# EAGLE board VUEQ (2) v64 (EAGLE 9.7.0)
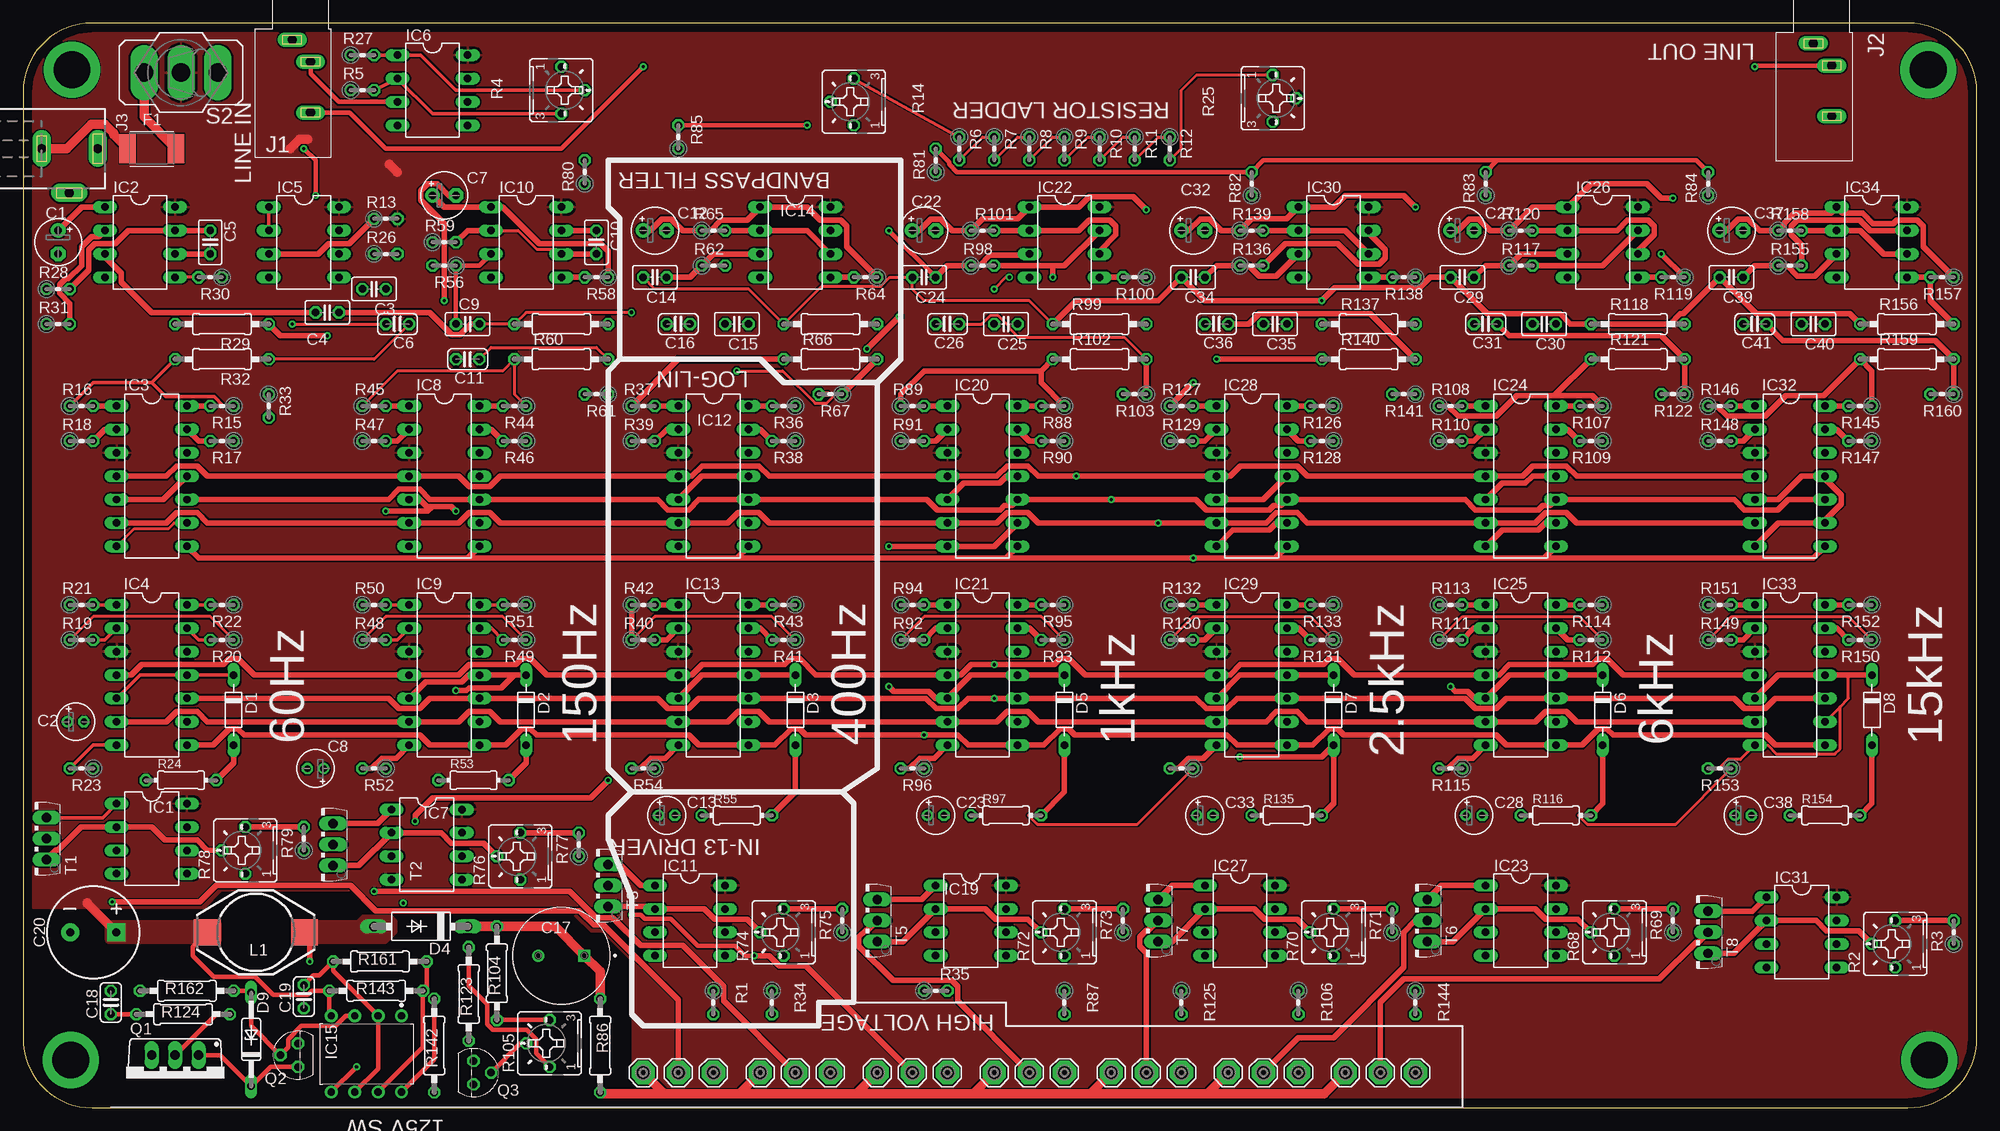
[diagram p0: board, top side]
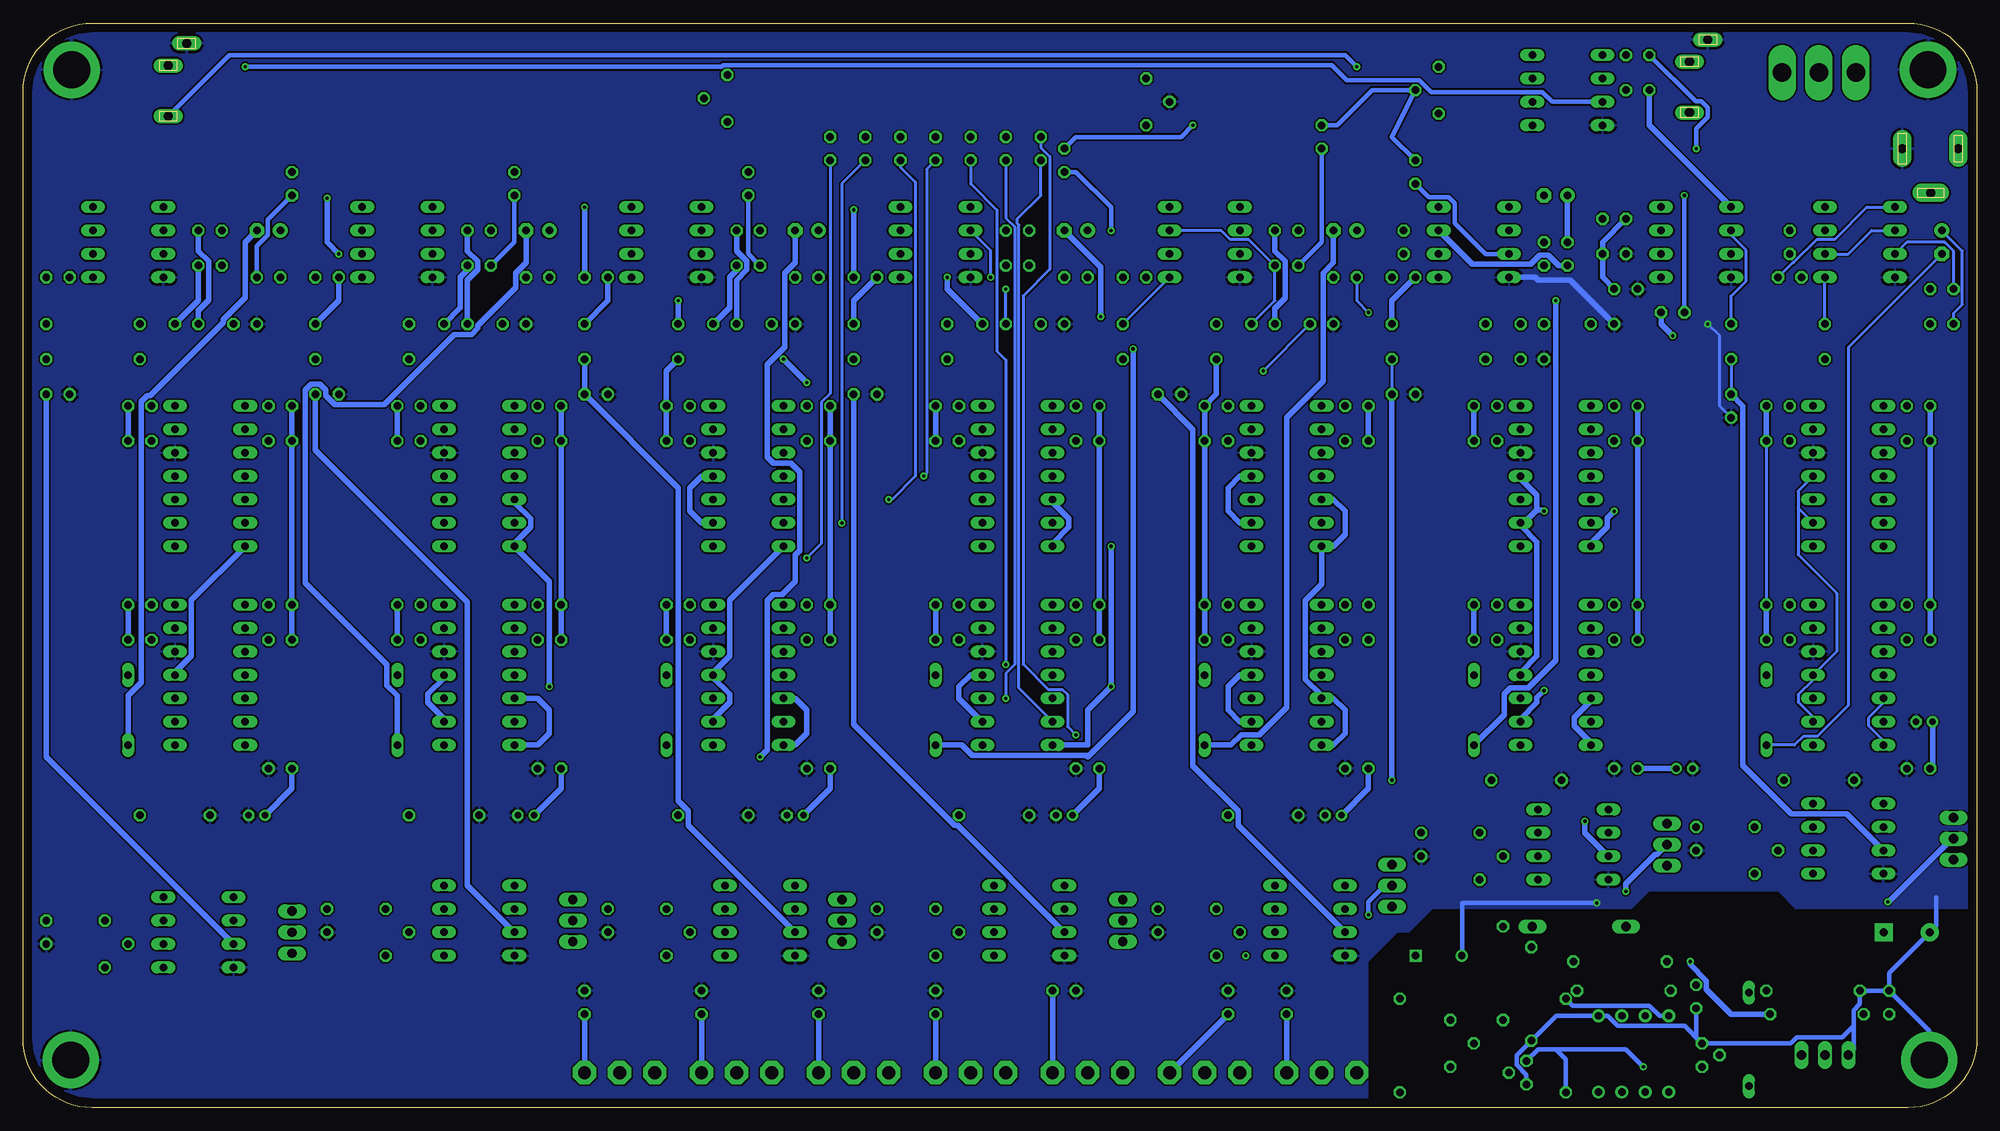
[diagram p1: board, bottom side, seen from below]

Size 212.07 x 117.78 mm. Coordinates in mm from the lower left corner, seen from the top.
Outline: 0,110.28 0,7.5 arc90 7.5,0 204.57,0 arc90 212.07,7.5 212.07,110.28 arc90 204.57,117.78 7.5,117.78 arc90 0,110.28
Copper layers (1*16): Top 0.035mm / dielectric 1.5mm / Bottom 0.035mm
Design rules "default": minimum track width 6mil, minimum drill 0.35mm, track to track 6mil, track to pad 6mil, pad to pad 6mil, via to via 6mil, smd to smd 6mil, copper to edge 40mil, drill to drill 6mil, minimum pad ring 10mil, minimum via ring 8mil, stop-mask expansion 4mil, vias tented up to drill 0mil, thermal gap 10mil

## Footprints (pad centres in the part's own frame; a part is rotated, then mirrored left to right if it is on the bottom)
E2,5-5 = drill 0.813 pad 1.6: + -1.27,0 | drill 0.813 pad 1.6 octagon: - 1.27,0
E1,8-4 = drill 0.711 pad 1.168: + -0.889,0 | drill 0.711 pad 1.168 octagon: - 0.889,0
C025-025X050 = drill 0.813 octagon: 1 -1.27,0; 2 1.27,0
C025-024X044 = drill 0.813 octagon: 1 -1.27,0; 2 1.27,0
CAP_RADIAL_5MM = drill 0.8 pad 1.2 square: 1 -2.5,0 | drill 0.8 pad 1.2: 2 2.5,0
CPOL-RADIAL-5MM-10MM-KIT = drill 0.9 pad 1.93 square: + 2.5,0 | drill 0.9 pad 1.93: - -2.5,0
D-7.5 = drill 0.813 long: A 3.81,0; C -3.81,0
F126-10 = drill 1.016 long: A 5.08,0; C -5.08,0
DO35Z10 = drill 0.813 long: A 5.08,0; C -5.08,0
FUSC4532X125 = smd 1.78 x 3.15: 1 -2.615,0; 2 2.615,0
DIL08 = drill 0.813 long: 1 -3.81,-3.81; 2 -1.27,-3.81; 3 1.27,-3.81; 4 3.81,-3.81; 5 3.81,3.81; 6 1.27,3.81; 7 -1.27,3.81; 8 -3.81,3.81
DIL14 = drill 0.813 long: 1 -7.62,-3.81; 2 -5.08,-3.81; 3 -2.54,-3.81; 4 0,-3.81; 5 2.54,-3.81; 6 5.08,-3.81; 7 7.62,-3.81; 8 7.62,3.81; 9 5.08,3.81; 10 2.54,3.81; 11 0,3.81; 12 -2.54,3.81; 13 -5.08,3.81; 14 -7.62,3.81
DIP826W53P254L959H508Q8B = drill 0.786 pad 1.386: 1 -4.13,3.81; 2 -4.13,1.27; 3 -4.13,-1.27; 4 -4.13,-3.81; 5 4.13,-3.81; 6 4.13,-1.27; 7 4.13,1.27; 8 4.13,3.81
SE14 = drill 1.397 pad 2.54 octagon: MP 0,0
CUI_SJ1-3533N = drill 1 pad 1.6 long: 1 0,0; 2 2.4,2; 3 7.9,2
DCJ0202 = drill 1 pad 2 long: 1 0,3.1; 2 4.8,0; 3 0,-3
DO3316P = smd 2.92 x 2.79: 1 -5.28,0; 2 5.28,0
TO220BV = drill 1.016 long: D 0,-2.54; G -2.54,-2.54; S 2.54,-2.54
TO92 = drill 0.813 octagon: 1 1.27,0; 2 0,1.905; 3 -1.27,0
0204V = drill 0.813 octagon: 1 -1.27,0; 2 1.27,0
B25P = drill 0.813 octagon: A -2.54,0; E 2.54,0; S 0,2.54
0204/7 = drill 0.813 octagon: 1 -3.81,0; 2 3.81,0
0207/10 = drill 0.813 octagon: 1 -5.08,0; 2 5.08,0
320-916 = drill 2.007 long: 1 0,4.013; 2 0,0; 3 0,-4.013
TO126V = drill 1.016 long: 1 -2.286,-1.27; 2 0,-1.27; 3 2.286,-1.27
SCREW_HOLE = drill 4 pad 6.096: P$1 0,0

## Placement (x,y rotation side)
C1  100uF  [E2,5-5]  3.81,93.98 270 top
C2  4.7uF  [E1,8-4]  5.71,41.91 0 top
C3  .1uF  [C025-025X050]  38.1,88.9 180 top
C4  F-C1  [C025-025X050]  33.02,86.36 0 top
C5  F-C2  [C025-025X050]  20.32,93.98 270 top
C6  1uF  [C025-024X044]  40.64,85.09 180 top
C7  100uF  [E2,5-5]  45.72,99.06 0 top
C8  4.7uF  [E1,8-4]  31.75,36.83 180 top
C9  F-C1  [C025-025X050]  48.26,85.09 0 top
C10  F-C2  [C025-025X050]  62.23,93.98 270 top
C11  1uF  [C025-024X044]  48.26,81.28 180 top
C12  100uF  [E2,5-5]  68.58,95.25 0 top
C13  4.7uF  [E1,8-4]  69.85,31.75 0 top
C14  F-C1  [C025-025X050]  68.58,90.17 180 top
C15  F-C2  [C025-025X050]  77.47,85.09 180 top
C16  1uF  [C025-024X044]  71.12,85.09 180 top
C17  4.7uF 350V  [CAP_RADIAL_5MM]  58.42,16.51 180 top
C18  470pF  [C025-024X044]  9.53,11.43 90 top
C19  2n2  [C025-024X044]  30.48,12.06 270 top
C20  1mf  [CPOL-RADIAL-5MM-10MM-KIT]  7.62,19.05 0 top
C22  100uF  [E2,5-5]  97.79,95.25 0 top
C23  4.7uF  [E1,8-4]  99.06,31.75 0 top
C24  F-C1  [C025-025X050]  97.79,90.17 180 top
C25  F-C2  [C025-025X050]  106.68,85.09 180 top
C26  1uF  [C025-024X044]  100.33,85.09 180 top
C27  100uF  [E2,5-5]  156.21,95.25 0 top
C28  4.7uF  [E1,8-4]  157.48,31.75 0 top
C29  F-C1  [C025-025X050]  156.21,90.17 180 top
C30  F-C2  [C025-025X050]  165.1,85.09 180 top
C31  1uF  [C025-024X044]  158.75,85.09 180 top
C32  100uF  [E2,5-5]  127,95.25 0 top
C33  4.7uF  [E1,8-4]  128.27,31.75 0 top
C34  F-C1  [C025-025X050]  127,90.17 180 top
C35  F-C2  [C025-025X050]  135.89,85.09 180 top
C36  1uF  [C025-024X044]  129.54,85.09 180 top
C37  100uF  [E2,5-5]  185.42,95.25 0 top
C38  4.7uF  [E1,8-4]  186.69,31.75 0 top
C39  F-C1  [C025-025X050]  185.42,90.17 180 top
C40  F-C2  [C025-025X050]  194.31,85.09 180 top
C41  1uF  [C025-024X044]  187.96,85.09 180 top
D1  1N4148  [D-7.5]  22.86,43.18 270 top
D2  1N4148  [D-7.5]  54.61,43.18 270 top
D3  1N4148  [D-7.5]  83.82,43.18 270 top
D4  BYT01  [F126-10]  43.18,19.69 180 top
D5  1N4148  [D-7.5]  113.03,43.18 270 top
D6  1N4148  [D-7.5]  171.45,43.18 270 top
D7  1N4148  [D-7.5]  142.24,43.18 270 top
D8  1N4148  [D-7.5]  200.66,43.18 270 top
D9  1N914  [DO35Z10]  24.77,7.42 90 top
F1  1812L010  [FUSC4532X125]  13.97,104.14 0 top
IC1  LM358N  [DIL08]  13.97,29.21 270 top
IC2  LM358N  [DIL08]  12.7,93.98 270 top
IC3  TS3704  [DIL14]  13.97,68.58 270 top
IC4  TS3704  [DIL14]  13.97,46.99 270 top
IC5  TL3472  [DIL08]  30.48,93.98 270 top
IC6  LM358N  [DIL08]  44.45,110.49 270 top
IC7  LM358N  [DIL08]  43.82,28.57 270 top
IC8  TS3704  [DIL14]  45.72,68.58 270 top
IC9  TS3704  [DIL14]  45.72,46.99 270 top
IC10  LM358N  [DIL08]  54.61,93.98 270 top
IC11  LM358N  [DIL08]  72.39,20.32 270 top
IC12  TS3704  [DIL14]  74.93,68.58 270 top
IC13  TS3704  [DIL14]  74.93,46.99 270 top
IC14  LM358N  [DIL08]  83.82,93.98 270 top
IC15  ICM7555_DIP  [DIP826W53P254L959H508Q8B]  37.27,5.84 270 top
IC19  LM358N  [DIL08]  102.87,20.32 270 top
IC20  TS3704  [DIL14]  104.14,68.58 270 top
IC21  TS3704  [DIL14]  104.14,46.99 270 top
IC22  LM358N  [DIL08]  113.03,93.98 270 top
IC23  LM358N  [DIL08]  162.56,20.32 270 top
IC24  TS3704  [DIL14]  162.56,68.58 270 top
IC25  TS3704  [DIL14]  162.56,46.99 270 top
IC26  LM358N  [DIL08]  171.45,93.98 270 top
IC27  LM358N  [DIL08]  132.08,20.32 270 top
IC28  TS3704  [DIL14]  133.35,68.58 270 top
IC29  TS3704  [DIL14]  133.35,46.99 270 top
IC30  LM358N  [DIL08]  142.24,93.98 270 top
IC31  LM358N  [DIL08]  193.04,19.05 270 top
IC32  TS3704  [DIL14]  191.77,68.58 270 top
IC33  TS3704  [DIL14]  191.77,46.99 270 top
IC34  LM358N  [DIL08]  200.66,93.98 270 top
IN13-1  SE14  [SE14]  67.31,3.81 0 top
IN13-2  SE14  [SE14]  71.12,3.81 0 top
IN13-3  SE14  [SE14]  80.01,3.81 0 top
IN13-4  SE14  [SE14]  83.82,3.81 0 top
IN13-5  SE14  [SE14]  92.71,3.81 0 top
IN13-6  SE14  [SE14]  96.52,3.81 0 top
IN13-9  SE14  [SE14]  105.41,3.81 0 top
IN13-10  SE14  [SE14]  109.22,3.81 0 top
IN13-11  SE14  [SE14]  130.81,3.81 0 top
IN13-12  SE14  [SE14]  134.62,3.81 0 top
IN13-13  SE14  [SE14]  118.11,3.81 0 top
IN13-14  SE14  [SE14]  121.92,3.81 0 top
IN13-15  SE14  [SE14]  143.51,3.81 0 top
IN13-16  SE14  [SE14]  147.32,3.81 0 top
IN-13-1  SE14  [SE14]  87.63,3.81 0 top
IN-13-2  SE14  [SE14]  100.33,3.81 0 top
IN-13-3  SE14  [SE14]  74.93,3.81 0 top
IN-13-5  SE14  [SE14]  113.03,3.81 0 top
IN-13-6  SE14  [SE14]  138.43,3.81 0 top
IN-13-7  SE14  [SE14]  125.73,3.81 0 top
IN-13-8  SE14  [SE14]  151.13,3.81 0 top
J1  SJ1-3533N  [CUI_SJ1-3533N]  29.21,115.96 270 top
J2  SJ1-3533N  [CUI_SJ1-3533N]  194.31,115.57 270 top
J3  DCJ0202  [DCJ0202]  5.02,104.14 270 top
L1  [DO3316P]  25.26,19.05 180 top
Q1  IRF740  [TO220BV]  16.51,3.17 180 top
Q2  PNP  [TO92]  29.84,5.71 90 top
Q3  BC547  [TO92]  48.9,3.81 270 top
R1  220k  [0204V]  74.93,11.43 270 top
R2  2k  [B25P]  203.2,17.78 90 top
R3  470  [0204V]  209.55,19.05 90 top
R4  250k  [B25P]  58.42,110.49 270 top
R5  10k  [0204V]  36.83,110.49 0 top
R6  470  [0204V]  101.6,104.14 270 top
R7  750  [0204V]  105.41,104.14 270 top
R8  1.1K  [0204V]  109.22,104.14 270 top
R9  2K  [0204V]  113.03,104.14 270 top
R10  2.7K  [0204V]  116.84,104.14 270 top
R11  4.7K  [0204V]  120.65,104.14 270 top
R12  7.5K  [0204V]  124.46,104.14 270 top
R13  100k  [0204V]  39.37,96.52 0 top
R14  2K  [B25P]  90.17,109.22 90 top
R15  10k  [0204V]  21.59,76.2 180 top
R16  10k  [0204V]  6.35,76.2 0 top
R17  10k  [0204V]  21.59,72.39 180 top
R18  10k  [0204V]  6.35,72.39 0 top
R19  10k  [0204V]  6.35,50.8 0 top
R20  10k  [0204V]  21.59,50.8 180 top
R21  10k  [0204V]  6.35,54.61 0 top
R22  10k  [0204V]  21.59,54.61 180 top
R23  10k  [0204V]  6.35,36.83 180 top
R24  1K  [0204/7]  17.14,35.56 0 top
R25  25K  [B25P]  135.64,109.6 270 top
R26  100k  [0204V]  39.37,92.71 0 top
R27  F-R1  [0204V]  36.83,114.3 0 top
R28  F-R2  [0204V]  3.81,88.9 0 top
R29  10k  [0207/10]  21.59,85.09 180 top
R30  10k  [0204V]  20.32,90.17 180 top
R31  F-R3  [0204V]  3.81,85.09 0 top
R32  10k  [0207/10]  21.59,81.28 0 top
R33  10k  [0204V]  26.67,76.2 270 top
R34  220k  [0204V]  81.28,11.43 270 top
R35  220k  [0204V]  99.06,12.7 0 top
R36  10k  [0204V]  82.55,76.2 180 top
R37  10k  [0204V]  67.31,76.2 0 top
R38  10k  [0204V]  82.55,72.39 180 top
R39  10k  [0204V]  67.31,72.39 0 top
R40  10k  [0204V]  67.31,50.8 0 top
R41  10k  [0204V]  82.55,50.8 180 top
R42  10k  [0204V]  67.31,54.61 0 top
R43  10k  [0204V]  82.55,54.61 180 top
R44  10k  [0204V]  53.34,76.2 180 top
R45  10k  [0204V]  38.1,76.2 0 top
R46  10k  [0204V]  53.34,72.39 180 top
R47  10k  [0204V]  38.1,72.39 0 top
R48  10k  [0204V]  38.1,50.8 0 top
R49  10k  [0204V]  53.34,50.8 180 top
R50  10k  [0204V]  38.1,54.61 0 top
R51  10k  [0204V]  53.34,54.61 180 top
R52  10k  [0204V]  38.1,36.83 180 top
R53  1K  [0204/7]  48.9,35.56 0 top
R54  10k  [0204V]  67.31,36.83 180 top
R55  1K  [0204/7]  77.47,31.75 0 top
R56  F-R2  [0204V]  45.72,91.44 180 top
R57  10k  [0207/10]  58.42,85.09 0 top
R58  10k  [0204V]  62.23,90.17 180 top
R59  F-R3  [0204V]  45.72,93.98 0 top
R60  10k  [0207/10]  58.42,81.28 0 top
R61  10k  [0204V]  62.23,77.47 180 top
R62  F-R2  [0204V]  74.93,91.44 0 top
R63  10k  [0207/10]  87.63,85.09 0 top
R64  10k  [0204V]  91.44,90.17 180 top
R65  F-R3  [0204V]  74.93,95.25 0 top
R66  10k  [0207/10]  87.63,81.28 0 top
R67  10k  [0204V]  87.63,77.47 180 top
R68  2k  [B25P]  172.72,19.05 90 top
R69  470  [0204V]  179.07,20.32 90 top
R70  2k  [B25P]  142.24,19.05 90 top
R71  470  [0204V]  148.59,20.32 90 top
R72  2k  [B25P]  113.03,19.05 90 top
R73  470  [0204V]  119.38,20.32 90 top
R74  2k  [B25P]  82.55,19.05 90 top
R75  470  [0204V]  88.9,20.32 90 top
R76  2k  [B25P]  53.98,27.3 90 top
R77  470  [0204V]  60.33,28.57 90 top
R78  2k  [B25P]  24.13,27.94 90 top
R79  470  [0204V]  30.48,29.21 90 top
R80  F-R1  [0204V]  60.96,101.6 90 top
R81  F-R1  [0204V]  99.06,102.87 90 top
R82  F-R1  [0204V]  133.35,100.33 90 top
R83  F-R1  [0204V]  158.75,100.33 90 top
R84  F-R1  [0204V]  182.88,100.33 90 top
R85  F-R1  [0204V]  71.12,105.41 90 top
R86  15k  [0207/10]  62.64,6.76 90 top
R87  220k  [0204V]  113.03,11.43 270 top
R88  10k  [0204V]  111.76,76.2 180 top
R89  10k  [0204V]  96.52,76.2 0 top
R90  10k  [0204V]  111.76,72.39 180 top
R91  10k  [0204V]  96.52,72.39 0 top
R92  10k  [0204V]  96.52,50.8 0 top
R93  10k  [0204V]  111.76,50.8 180 top
R94  10k  [0204V]  96.52,54.61 0 top
R95  10k  [0204V]  111.76,54.61 180 top
R96  10k  [0204V]  96.52,36.83 180 top
R97  1K  [0204/7]  106.68,31.75 0 top
R98  F-R2  [0204V]  104.14,91.44 0 top
R99  10k  [0207/10]  116.84,85.09 0 top
R100  10k  [0204V]  120.65,90.17 180 top
R101  F-R3  [0204V]  104.14,95.25 0 top
R102  10k  [0207/10]  116.84,81.28 0 top
R103  10k  [0204V]  120.65,77.47 180 top
R104  220k  [0207/10]  51.44,14.6 90 top
R105  25K  [B25P]  57.15,6.98 90 top
R106  220k  [0204V]  138.43,11.43 270 top
R107  10k  [0204V]  170.18,76.2 180 top
R108  10k  [0204V]  154.94,76.2 0 top
R109  10k  [0204V]  170.18,72.39 180 top
R110  10k  [0204V]  154.94,72.39 0 top
R111  10k  [0204V]  154.94,50.8 0 top
R112  10k  [0204V]  170.18,50.8 180 top
R113  10k  [0204V]  154.94,54.61 0 top
R114  10k  [0204V]  170.18,54.61 180 top
R115  10k  [0204V]  154.94,36.83 180 top
R116  1K  [0204/7]  166.37,31.75 0 top
R117  F-R2  [0204V]  162.56,91.44 0 top
R118  10k  [0207/10]  175.26,85.09 0 top
R119  10k  [0204V]  179.07,90.17 180 top
R120  F-R3  [0204V]  162.56,95.25 0 top
R121  10k  [0207/10]  175.26,81.28 0 top
R122  10k  [0204V]  179.07,77.47 180 top
R123  200  [0207/10]  48.37,12.36 90 top
R124  1k  [0207/10]  17.37,10.16 0 top
R125  220k  [0204V]  125.73,11.43 270 top
R126  10k  [0204V]  140.97,76.2 180 top
R127  10k  [0204V]  125.73,76.2 0 top
R128  10k  [0204V]  140.97,72.39 180 top
R129  10k  [0204V]  125.73,72.39 0 top
R130  10k  [0204V]  125.73,50.8 0 top
R131  10k  [0204V]  140.97,50.8 180 top
R132  10k  [0204V]  125.73,54.61 0 top
R133  10k  [0204V]  140.97,54.61 180 top
R134  10k  [0204V]  125.73,36.83 180 top
R135  1K  [0204/7]  137.16,31.75 0 top
R136  F-R2  [0204V]  133.35,91.44 0 top
R137  10k  [0207/10]  146.05,85.09 0 top
R138  10k  [0204V]  149.86,90.17 180 top
R139  F-R3  [0204V]  133.35,95.25 0 top
R140  10k  [0207/10]  146.05,81.28 0 top
R141  10k  [0204V]  149.86,77.47 180 top
R142  33k  [0207/10]  44.63,6.76 90 top
R143  1k  [0207/10]  38.33,12.7 180 top
R144  220k  [0204V]  151.13,11.43 270 top
R145  10k  [0204V]  199.39,76.2 180 top
R146  10k  [0204V]  184.15,76.2 0 top
R147  10k  [0204V]  199.39,72.39 180 top
R148  10k  [0204V]  184.15,72.39 0 top
R149  10k  [0204V]  184.15,50.8 0 top
R150  10k  [0204V]  199.39,50.8 180 top
R151  10k  [0204V]  184.15,54.61 0 top
R152  10k  [0204V]  199.39,54.61 180 top
R153  10k  [0204V]  184.15,36.83 180 top
R154  1K  [0204/7]  195.58,31.75 0 top
R155  F-R2  [0204V]  191.77,91.44 0 top
R156  10k  [0207/10]  204.47,85.09 0 top
R157  10k  [0204V]  208.28,90.17 180 top
R158  F-R3  [0204V]  191.77,95.25 0 top
R159  10k  [0207/10]  204.47,81.28 0 top
R160  10k  [0204V]  208.28,77.47 180 top
R161  10k  [0207/10]  38.74,15.88 0 top
R162  1k  [0207/10]  17.78,12.7 0 top
S2  [320-916]  17.14,112.39 90 top
T1  MJE340  [TO126V]  1.27,29.21 90 top
T2  MJE340  [TO126V]  32.38,28.57 90 top
T3  MJE340  [TO126V]  62.23,24.13 90 top
T5  MJE340  [TO126V]  91.44,20.32 90 top
T6  MJE340  [TO126V]  151.13,20.32 90 top
T7  MJE340  [TO126V]  121.92,20.32 90 top
T8  MJE340  [TO126V]  181.61,19.05 90 top
U$1  SCREW_HOLE  [SCREW_HOLE]  5.31,112.7 0 top
U$2  SCREW_HOLE  [SCREW_HOLE]  206.77,112.69 0 top
U$4  SCREW_HOLE  [SCREW_HOLE]  5.17,5.17 0 top
U$5  SCREW_HOLE  [SCREW_HOLE]  206.9,5.17 0 top

## Library data of the parts
C1-C16 C18 C19 C22-C41 R1 R3 R5-R13 R15-R24 R26-R67 R69 R71 R73 R75 R77 R79-R104 R106-R162 = rcl
C17 = Resistor_Capacitor; CREATED_BY: PCBLayout.com; DIGIKEY_PART_NUMBER: P5156-ND; MANUFACTURER: Panasonic Electronic Components; MPN: ECA-1EM102; PACKAGE: CAP RADIAL 5MM LS
C20 = SparkFun-Capacitors; PROD_ID: CAP-09538
D1-D9 = diode
F1 = Fuse; CATEGORY: FUSE; DESCRIPTION: Resettable PTCs; MANUFACTURER: Littlefuse; MPN: 1812L010; OPERATING_TEMPERATURE: -40°C to +85°C; PART_STATUS: ACTIVE; ROHS_COMPLIANCE: RoHS Compliant; SERIES: 1812L; SUBCATEGORY: Resettable; TYPE: PTC
IC1-IC14 IC19-IC34 = linear
IC15 = IC_Clock-Timing; CATEGORY: IC_Clock-Timing; CURRENT-SUPPLY: 60µA; DESCRIPTION: IC OSC SINGLE TIMER 1MHZ 8DIP; FREQUENCY: 1MHz; MANUFACTURER: Renesas Electronics America Inc; MPN: ICM7555IPAZ; OPERATING_TEMP: -25°C to 85°C; PART_STATUS: Active; ROHS_COMPLIANT: ROHS3 Compliant; SUB-CATEGORY: Timer
IN13-1-IN13-6 IN13-9-IN13-16 IN-13-1-IN-13-3 IN-13-5-IN-13-8 = solpad
J1 J2 = Switch; AVAILABILITY: Good; DESCRIPTION: SJ1 Series 3.5 mm 12 V Right Angle Through Hole Stereo Audio Jack; MF: CUI; MP: SJ1-3533N; PACKAGE: None; PRICE: 0.88 USD
J3 = con-jack; OC_FARNELL: unknown; OC_NEWARK: unknown
L1 = inductor-coilcraft; OC_FARNELL: unknown; OC_NEWARK: unknown
Q1 = transistor; CATEGORY: Transistor; DESCRIPTION: MOSFET N-CH 100V 33A TO-220AB; DRAIN_CURRENT: 33A; MANUFACTURER: Infineon Technologies; MPN: IRF540NPBF; OPERATING_TEMP: -55°C ~ 175°C; PART_STATUS: Active; ROHS_COMPLIANT: Yes; SUB-CATEGORY: MOSFET; THERMALLOSS: 130W; TYPE: N-Channel
Q2 = transistor; CATEGORY: Transistor; SUB-CATEGORY: BJT; TYPE: PNP
Q3 = transistor; CATEGORY: Transistor; SUB-CATEGORY: BJT; TYPE: NPN
R2 R4 R14 R25 R68 R70 R72 R74 R76 R78 R105 = pot
S2 = switch
T1-T3 T5-T8 = transistor
U$1 U$2 U$4 U$5 = Dean

## Nets
+125V: IN13-1.MP IN13-3.MP IN13-5.MP IN13-9.MP IN13-11.MP IN13-13.MP IN13-15.MP R86.1
GND: C2.- C3.2 C6.2 C8.- C11.2 C13.- C16.2 C17.2 C18.2 C19.2 C20.- C23.- C26.2 C28.- C31.2 C33.- C36.2 C38.- C41.2 IC1.4 IC2.4 IC3.12 IC4.12 IC5.4 IC6.4 IC7.4 IC8.12 IC9.12 IC10.4 IC11.4 IC12.12 IC13.12 IC14.4 IC15.1 IC19.4 IC20.12 IC21.12 IC22.4 IC23.4 IC24.12 IC25.12 IC26.4 IC27.4 IC28.12 IC29.12 IC30.4 IC31.4 IC32.12 IC33.12 IC34.4 J1.1 J2.1 J3.1 Q1.S Q2.1 Q3.1 R1.1 R3.1 R14.S R23.1 R24.1 R26.1 R33.2 R34.1 R35.1 R52.1 R53.1 R54.1 R55.1 R61.2 R67.2 R69.1 R71.1 R73.1 R75.1 R77.1 R79.1 R87.1 R96.1 R97.1 R103.2 R106.1 R115.1 R116.1 R122.2 R123.1 R125.1 R134.1 R135.1 R141.2 R144.1 R153.1 R154.1 R160.2 R162.1 U$1.P$1 U$2.P$1 U$4.P$1 U$5.P$1
N$1: IN-13-3.MP R1.2
N$2: IC6.2 R4.E R5.2
N$3: R2.E R3.2
N$4: IN-13-1.MP R34.2
N$5: IN13-2.MP T1.2
N$6: IC1.1 T1.3
N$7: IC6.3 J1.2 J2.2
N$8: IC6.1 R4.S R27.2 R80.2 R81.2 R82.2 R83.2 R84.2 R85.2
N$9: C1.- D1.A R24.2
N$10: C3.1 IC5.3 R13.1 R26.2
N$11: IC4.8 IC9.8 IC13.8 IC21.8 IC25.8 IC29.8 IC33.8 R6.1 R14.E
N$12: C24.1 IC22.3 R81.1 R98.1
N$13: IC3.8 IC8.8 IC12.8 IC20.8 IC24.8 IC28.8 IC32.8 R12.2 R25.A
N$14: IC3.6 IC8.6 IC12.6 IC20.6 IC24.6 IC28.6 IC32.6 R11.2 R12.1
N$15: IC3.10 IC8.10 IC12.10 IC20.10 IC24.10 IC28.10 IC32.10 R10.2 R11.1
N$16: IC3.4 IC8.4 IC12.4 IC20.4 IC24.4 IC28.4 IC32.4 R9.2 R10.1
N$17: IC4.4 IC9.4 IC13.4 IC21.4 IC25.4 IC29.4 IC33.4 R8.2 R9.1
N$18: IC4.10 IC9.10 IC13.10 IC21.10 IC25.10 IC29.10 IC33.10 R7.2 R8.1
N$19: IC4.6 IC9.6 IC13.6 IC21.6 IC25.6 IC29.6 IC33.6 R6.2 R7.1
N$20: C34.1 IC30.3 R82.1 R136.1
N$21: C5.1 IC2.7 R28.2
N$22: IC3.13 R17.2
N$23: IC3.1 R16.2
N$24: IC3.2 R18.2
N$25: IC3.14 R15.2
N$26: IC4.2 R19.2
N$27: IC4.13 R20.2
N$28: IC4.1 R21.2
N$29: IC4.14 R22.2
N$30: R15.1 R16.1 R17.1 R18.1 R19.1 R20.1 R21.1 R22.1 R32.1
N$31: IN13-4.MP T2.2
N$32: C5.2 IC2.2 IC2.6 R31.2
N$33: C2.+ D1.C IC3.5 IC3.7 IC3.9 IC3.11 IC4.5 IC4.7 IC4.9 IC4.11 R23.2
N$34: IC2.5 R29.2 R30.2
N$35: C1.+ IC2.1 R30.1 R31.1
N$36: C6.1 IC1.3 R32.2 R33.1
N$37: IC7.1 T2.3
N$38: C4.1 IC2.3 R27.1 R28.1
N$39: R68.E R69.2
N$40: C39.1 IC34.3 R84.1 R155.1
N$41: C9.1 IC10.3 R56.1 R80.1
N$42: J1.3 J2.3
N$43: C17.1 D4.C R86.2 R104.2
N$44: R104.1 R105.E
N$45: IC15.5 Q3.3 R142.1
N$46: IC8.1 R45.2
N$47: IC9.2 R48.2
N$48: R44.1 R45.1 R46.1 R47.1 R48.1 R49.1 R50.1 R51.1 R60.1
N$49: C8.+ D2.C IC8.5 IC8.7 IC8.9 IC8.11 IC9.5 IC9.7 IC9.9 IC9.11 R52.2
N$50: R105.A R123.2
N$51: C10.1 IC10.7 R56.2
N$52: C10.2 IC10.2 IC10.6 R59.2
N$53: IC10.5 R57.2 R58.2
N$54: C7.+ IC10.1 R58.1 R59.1
N$55: C7.- D2.A R53.2
N$56: C11.1 IC7.3 R60.2 R61.1
N$57: C14.1 IC14.3 R62.1 R85.1
N$58: IN-13-2.MP R35.2
N$59: IN13-6.MP T3.2
N$60: IC8.13 R46.2
N$61: IC8.2 R47.2
N$62: IC8.14 R44.2
N$63: IC9.13 R49.2
N$64: IC9.1 R50.2
N$65: IC9.14 R51.2
N$66: IC11.1 T3.3
N$67: IC12.1 R37.2
N$68: IC13.2 R40.2
N$69: R36.1 R37.1 R38.1 R39.1 R40.1 R41.1 R42.1 R43.1 R66.1
N$70: C13.+ D3.C IC12.5 IC12.7 IC12.9 IC12.11 IC13.5 IC13.7 IC13.9 IC13.11 R54.2
N$71: C15.1 IC14.7 R62.2
N$72: C15.2 IC14.2 IC14.6 R65.2
N$73: IC14.5 R63.2 R64.2
N$74: C12.+ IC14.1 R64.1 R65.1
N$75: C12.- D3.A R55.2
N$76: C16.1 IC11.3 R66.2 R67.1
N$77: IC12.13 R38.2
N$78: IC12.2 R39.2
N$79: IC12.14 R36.2
N$80: IC13.13 R41.2
N$81: IC13.1 R42.2
N$82: IC13.14 R43.2
N$83: IC23.2 R68.S T6.1
N$84: D4.A L1.1 Q1.D R124.2
N$85: F1.1 J3.3
N$86: IC20.2 R91.2
N$87: IC20.1 R89.2
N$88: IC20.14 R88.2
N$89: IC20.13 R90.2
N$90: IC21.2 R92.2
N$91: IC21.1 R94.2
N$92: IC21.14 R95.2
N$93: IC21.13 R93.2
N$94: IC28.2 R129.2
N$95: IC28.1 R127.2
N$96: IC28.14 R126.2
N$97: IC28.13 R128.2
N$98: IC29.2 R130.2
N$99: IC29.1 R132.2
N$100: IC29.14 R133.2
N$101: IC29.13 R131.2
N$102: IC24.2 R110.2
N$103: IC24.1 R108.2
N$104: IC24.14 R107.2
N$105: IC24.13 R109.2
N$106: IC25.2 R111.2
N$107: IC25.1 R113.2
N$108: IC25.14 R114.2
N$109: IC25.13 R112.2
N$110: IC32.2 R148.2
N$111: IC32.1 R146.2
N$112: IC32.14 R145.2
N$113: IC32.13 R147.2
N$114: IC33.2 R149.2
N$115: IC33.1 R151.2
N$116: IC33.14 R152.2
N$117: C18.1 R124.1
N$118: IC15.7 R143.1 R161.2
N$119: C19.1 IC15.2 IC15.6 R161.1
N$120: D9.C Q1.G Q2.3
N$121: D9.A IC15.3 Q2.2 R162.2
N$122: Q3.2 R105.S
N$123: F1.2 S2.1
N$126: IN-13-5.MP R87.2
N$127: IN13-10.MP T5.2
N$128: IC19.1 T5.3
N$131: R88.1 R89.1 R90.1 R91.1 R92.1 R93.1 R94.1 R95.1 R102.1
N$132: C23.+ D5.C IC20.5 IC20.7 IC20.9 IC20.11 IC21.5 IC21.7 IC21.9 IC21.11 R96.2
N$133: C25.1 IC22.7 R98.2
N$134: C25.2 IC22.2 IC22.6 R101.2
N$135: IC22.5 R99.2 R100.2
N$136: C22.+ IC22.1 R100.1 R101.1
N$137: C22.- D5.A R97.2
N$138: C26.1 IC19.3 R102.2 R103.1
N$145: R70.E R71.2
N$146: IC27.2 R70.S T7.1
N$147: IC31.2 R2.S T8.1
N$157: IN-13-6.MP R106.2
N$158: IN13-12.MP T6.2
N$159: IC23.1 T6.3
N$162: R107.1 R108.1 R109.1 R110.1 R111.1 R112.1 R113.1 R114.1 R121.1
N$163: C28.+ D6.C IC24.5 IC24.7 IC24.9 IC24.11 IC25.5 IC25.7 IC25.9 IC25.11 R115.2
N$164: C30.1 IC26.7 R117.2
N$165: C30.2 IC26.2 IC26.6 R120.2
N$166: IC26.5 R118.2 R119.2
N$167: C27.+ IC26.1 R119.1 R120.1
N$168: C27.- D6.A R116.2
N$169: C31.1 IC23.3 R121.2 R122.1
N$176: R72.E R73.2
N$177: IC19.2 R72.S T5.1
N$178: R74.E R75.2
N$188: IN-13-7.MP R125.2
N$189: IN13-14.MP T7.2
N$190: IC27.1 T7.3
N$193: R126.1 R127.1 R128.1 R129.1 R130.1 R131.1 R132.1 R133.1 R140.1
N$194: C33.+ D7.C IC28.5 IC28.7 IC28.9 IC28.11 IC29.5 IC29.7 IC29.9 IC29.11 R134.2
N$195: C35.1 IC30.7 R136.2
N$196: C35.2 IC30.2 IC30.6 R139.2
N$197: IC30.5 R137.2 R138.2
N$198: C32.+ IC30.1 R138.1 R139.1
N$199: C32.- D7.A R135.2
N$200: C36.1 IC27.3 R140.2 R141.1
N$207: IC11.2 R74.S T3.1
N$208: R76.E R77.2
N$209: IC7.2 R76.S T2.1
N$218: C29.1 IC26.3 R83.1 R117.1
N$219: IN-13-8.MP R144.2
N$220: IN13-16.MP T8.2
N$221: IC31.1 T8.3
N$224: R145.1 R146.1 R147.1 R148.1 R149.1 R150.1 R151.1 R152.1 R159.1
N$225: C38.+ D8.C IC32.5 IC32.7 IC32.9 IC32.11 IC33.5 IC33.7 IC33.9 IC33.11 R153.2
N$226: C40.1 IC34.7 R155.2
N$227: C40.2 IC34.2 IC34.6 R158.2
N$228: IC34.5 R156.2 R157.2
N$229: C37.+ IC34.1 R157.1 R158.1
N$230: C37.- D8.A R154.2
N$231: C41.1 IC31.3 R159.2 R160.1
N$238: R78.E R79.2
N$239: IC1.2 R78.S T1.1
N$241: IC33.13 R150.2
VCC: C20.+ IC1.8 IC2.8 IC3.3 IC4.3 IC5.8 IC6.8 IC7.8 IC8.3 IC9.3 IC10.8 IC11.8 IC12.3 IC13.3 IC14.8 IC15.4 IC15.8 IC19.8 IC20.3 IC21.3 IC22.8 IC23.8 IC24.3 IC25.3 IC26.8 IC27.8 IC28.3 IC29.3 IC30.8 IC31.8 IC32.3 IC33.3 IC34.8 L1.2 R13.2 R25.S R142.2 R143.2 S2.2
VCC/2: C4.2 C9.2 C14.2 C24.2 C29.2 C34.2 C39.2 IC5.1 IC5.2 R5.1 R29.1 R57.1 R63.1 R99.1 R118.1 R137.1 R156.1

## Tracks (layer width: path | path; a pad name or v marks a point on that pad's centre or on a via)
+125V
  Top 1.016: 77.72,1.52 IN13-3.MP | 77.72,1.52 90.42,1.52 | 90.42,1.52 IN13-5.MP | 90.42,1.52 103.12,1.52 | 103.12,1.52 IN13-9.MP | 103.12,1.52 115.82,1.52 | 115.82,1.52 IN13-13.MP | 115.82,1.52 128.52,1.52 | 128.52,1.52 IN13-11.MP | 128.52,1.52 141.22,1.52 IN13-15.MP | IN13-1.MP 69.44,1.68 69.6,1.52 | 77.72,1.52 69.6,1.52 | 69.6,1.52 62.79,1.52 R86.1
GND  (via drill 0.35)
  Top 0.305: v29.21,85.09 C6.2 | 109.12,31.75 110.09,30.78 120.95,30.78 R134.1 | 168.81,31.75 169.78,30.78 179.38,30.78 R153.1
  Top 0.61: 87.32,77.47 R67.2
  Bottom 0.305: R33.2 27.94,76.2 27.94,83.82 v29.21,85.09
  Bottom 0.508: 4.45,22.86 4.45,19.73 C20.- 9.53,14.64 C18.2 | C18.2 R162.1 12.7,11.26 13.36,10.6 13.36,8.89 | C18.2 5.17,8.35 U$4.P$1 | Q1.S 13.36,6.32 13.36,8.89 | Q2.1 20.19,6.98 19.53,7.64 14.61,7.64 13.36,8.89 | C19.2 30.48,7.62 Q2.1 | Q2.1 31.73,8.87 38.99,8.87 40.09,9.97 IC15.1 45.68,9.97 R123.1 49.96,5.69 49.96,4.64 48.9,3.57 Q3.1 | C17.2 55.88,16.55 55.88,22.23 v41.28,22.23
  Bottom 0.61: IC10.4 47.95,90.17 47.64,89.87 44.15,89.87 C6.2
  pour Bottom: -11.43,25.4 -11.43,116.84 -1.27,127 205.11,127 223.52,108.58 223.52,0.63 214.63,-8.26 71.75,-8.26 66.04,-2.54 66.04,15.88 62.87,19.05 61.6,19.05 59.05,21.59 37.47,21.59 35.56,23.49 21.59,23.49 19.68,21.59 -7.62,21.59
N$1
  Bottom 0.61: R1.2 IN-13-3.MP
N$2
  Top 0.406: R5.2 IC6.2 44.45,107.95 R4.E
N$3
  Top 0.61: R2.E R3.2
N$4
  Bottom 0.61: R34.2 IN-13-1.MP
N$5  (via drill 0.35)
  Top 0.61: IN13-2.MP 71.12,11.73 62.99,19.86 61.92,19.86 60.39,21.39 38.3,21.39 35.56,24.13 20.95,24.13 19.17,22.35 v9.67,22.35
  Bottom 0.61: v9.67,22.35 9.6,22.35 2.74,29.21 T1.2
N$6
  Top 0.406: T1.3 8.64,31.5 IC1.1
N$7  (via drill 0.35)
  Top 0.508: J1.2 31.21,112.3 34.29,109.22 IC6.3 | J2.2 188.1,113.17 v187.96,113.03
  Bottom 0.508: v187.96,113.03 136.26,113.03 136.08,113.21 70.03,113.21 68.38,111.56 60.52,111.56 59.25,110.29 47.16,110.29 46.09,109.22 IC6.3
N$8  (via drill 0.35)
  Top 0.406: R27.2 IC6.1 43.18,114.3 46.99,110.49 R4.S
  Top 0.508: R84.2 181.61,102.87 160.02,102.87 | 160.02,102.87 R83.2 | 160.02,102.87 134.62,102.87 R82.2 101.36,101.6 100.53,102.43 100.53,102.67 R81.2 | R85.2 v85.09,106.68
  Bottom 0.508: R80.2 63.5,105.41 R4.S 65.62,110.49 69.43,106.68 R85.2 | v85.09,106.68 86.36,105.41 97.79,105.41 R81.2
N$9
  Top 0.61: D1.A 22.86,37.46 R24.2
  Bottom 0.305: C1.- 13.97,82.55 13.97,43.7 17.33,40.34 18.84,40.34 19.8,39.37 D1.A
N$10
  Top 0.61: R13.1 35.41,93.83 33.17,93.83 32.05,92.71 IC5.3
  Bottom 0.61: R13.1 40.64,93.98 R26.2 40.64,90.17 C3.1
N$11  (via drill 0.35)
  Top 0.305: R14.E R6.1
  Top 0.61: IC4.8 20.62,39.37 22.4,41.15 23.32,41.15 23.98,40.49 43.03,40.49 44.15,39.37 IC9.8 52.37,39.37 54.15,41.15 55.07,41.15 55.73,40.49 72.24,40.49 73.36,39.37 IC13.8 81.58,39.37 83.36,41.15 84.28,41.15 84.94,40.49 v97.79,40.49 101.45,40.49 102.57,39.37 IC21.8 110.79,39.37 112.57,41.15 113.49,41.15 114.15,40.49 130.66,40.49 131.78,39.37 IC29.8 140,39.37 141.78,41.15 142.7,41.15 143.36,40.49 159.87,40.49 160.99,39.37 IC25.8 169.21,39.37 170.99,41.15 171.91,41.15 172.57,40.49 189.08,40.49 190.2,39.37 IC33.8
  Bottom 0.305: R6.1 101.6,104.23 100.63,103.27 100.63,91.04 103.53,88.15 103.53,48.16 100.78,45.41 99.27,45.41 98.7,44.85 98.7,41.4 v97.79,40.49
N$12  (via drill 0.35)
  Top 0.508: v93.98,95.25 C24.1
  Top 0.61: IC22.3 109.07,92.56 104.95,92.56 103.83,91.44 R98.1 100.33,91.44 C24.1
  Bottom 0.508: R81.1 97.79,101.6 93.98,97.79 v93.98,95.25
N$13  (via drill 0.35)
  Top 0.305: R12.2 125.73,104.14 125.73,110.49 127.38,112.14 R25.A
  Top 0.61: 48.26,59.69 19.05,59.69 IC3.8 | 48.26,59.69 IC8.8 | 77.47,59.69 IC12.8 | 77.47,59.69 106.68,59.69 | 106.68,59.69 IC20.8 | 106.68,59.69 v127,59.69 135.89,59.69 | 135.89,59.69 IC28.8 | 135.89,59.69 165.1,59.69 | 165.1,59.69 IC24.8 | 165.1,59.69 194.31,59.69 IC32.8 | 77.47,59.69 48.26,59.69
  Bottom 0.305: R12.2 124.46,77.56 125.42,76.6 125.42,61.26 v127,59.69
N$14  (via drill 0.35)
  Top 0.305: R11.2 123.19,105.41 R12.1
  Top 0.61: IC3.6 15.54,63.5 16.66,64.62 18.9,64.62 20.02,63.5 IC8.6 47.29,63.5 48.41,64.62 50.65,64.62 51.77,63.5 IC12.6 76.5,63.5 77.62,64.62 79.86,64.62 80.98,63.5 IC20.6 105.71,63.5 106.83,64.62 109.07,64.62 110.19,63.5 v123.19,63.5 IC28.6 134.92,63.5 136.04,64.62 138.28,64.62 139.4,63.5 IC24.6 164.13,63.5 165.25,64.62 167.49,64.62 168.61,63.5 IC32.6
  Bottom 0.305: R11.2 123.19,100.33 v123.19,63.5
N$15  (via drill 0.35)
  Top 0.305: R10.2 119.38,105.41 R11.1
  Top 0.61: IC3.10 39.67,66.04 40.79,67.16 43.03,67.16 44.15,66.04 IC8.10 68.88,66.04 70,64.92 72.24,64.92 73.36,66.04 IC12.10 98.09,66.04 99.21,64.92 106.05,64.92 106.51,65.38 107.29,65.38 IC20.10 v118.11,66.04 127.3,66.04 128.42,64.92 135.26,64.92 135.72,65.38 136.5,65.38 IC28.10 156.51,66.04 157.63,64.92 164.47,64.92 164.93,65.38 165.71,65.38 IC24.10 185.72,66.04 186.84,64.92 190.46,64.92 191.58,66.04 IC32.10
  Bottom 0.305: R10.2 116.84,102.15 115.21,100.53 115.21,68.58 117.75,66.04 v118.11,66.04
N$16  (via drill 0.35)
  Top 0.305: R9.2 115.57,105.41 R10.1
  Top 0.61: IC3.4 15.54,68.58 16.66,69.7 18.9,69.7 20.02,68.58 IC8.4 47.29,68.58 48.41,67.46 50.65,67.46 51.77,68.58 IC12.4 72.58,68.58 73.7,69.7 79.86,69.7 80.98,68.58 IC20.4 105.71,68.58 106.83,69.7 109.07,69.7 110.19,68.58 v114.3,68.58 IC28.4 131,68.58 132.12,69.7 138.28,69.7 139.4,68.58 IC24.4 162.75,68.58 163.87,69.7 167.49,69.7 168.61,68.58 IC32.4
  Bottom 0.305: R9.2 113.99,101.91 113.99,68.88 v114.3,68.58
N$17  (via drill 0.35)
  Top 0.305: R8.2 111.76,105.41 R9.1
  Top 0.61: IC4.4 11.77,46.99 12.88,48.11 21.74,48.11 22.4,48.77 23.32,48.77 25.1,46.99 IC9.4 47.29,46.99 48.41,48.11 53.49,48.11 54.15,48.77 55.07,48.77 56.85,46.99 IC13.4 72.58,46.99 73.7,48.11 82.7,48.11 83.36,48.77 84.28,48.77 86.06,46.99 IC21.4 101.79,46.99 102.91,48.11 v105.41,48.11 111.91,48.11 112.57,48.77 113.49,48.77 115.27,46.99 IC29.4 131,46.99 132.12,48.11 141.12,48.11 141.78,48.77 142.7,48.77 144.48,46.99 IC25.4 160.21,46.99 161.33,48.11 170.33,48.11 170.99,48.77 171.91,48.77 173.69,46.99 IC33.4
  Bottom 0.305: R8.2 109.22,100.33 106.38,97.48 106.38,82.15 105.41,81.19 v105.41,48.11
N$18  (via drill 0.35)
  Top 0.305: R7.2 107.95,105.41 R8.1
  Top 0.61: IC33.10 190.2,44.45 189.08,43.33 186.84,43.33 185.72,44.45 IC25.10 160.99,44.45 159.87,43.33 157.63,43.33 156.51,44.45 IC29.10 131.78,44.45 130.66,43.33 128.42,43.33 127.3,44.45 IC21.10 v105.41,44.45 102.57,44.45 101.45,43.33 99.1,43.33 97.98,44.45 IC13.10 73.36,44.45 72.24,43.33 70,43.33 68.88,44.45 IC9.10 44.15,44.45 43.03,43.33 40.79,43.33 39.67,44.45 IC4.10
  Bottom 0.305: R7.2 105.41,96.62 104.44,95.65 104.44,48.11 105.41,47.14 v105.41,44.45
N$19
  Top 0.305: R6.2 104.14,105.41 R7.1
  Top 0.61: IC4.6 15.54,41.91 16.66,43.03 18.9,43.03 20.02,41.91 IC9.6 47.29,41.91 48.41,43.03 50.65,43.03 51.77,41.91 IC13.6 76.5,41.91 77.62,43.03 79.86,43.03 80.98,41.91 IC21.6 105.71,41.91 106.83,43.03 109.07,43.03 110.19,41.91 IC29.6 134.92,41.91 136.04,43.03 138.28,43.03 139.4,41.91 IC25.6 164.13,41.91 165.25,43.03 167.49,43.03 168.61,41.91 IC33.6
  Bottom 0.305: R6.2 101.6,99.06 104.14,96.52 104.14,95.99 103.99,95.84 103.99,45.57 IC21.6
N$20
  Top 0.61: IC30.3 136.04,90.32 134.16,90.32 133.04,91.44 R136.1 129.54,91.44 C34.1
  Bottom 0.508: R82.1 133.35,92.76 132.79,92.2 132.79,92.15 R136.1
N$21
  Top 0.61: C5.1 IC2.7 11.43,95.25 10.01,93.83 7.77,93.83 7.11,93.17 7.11,90.93 R28.2
N$22
  Top 0.61: IC3.13 19.05,72.39 R17.2
N$23
  Top 0.61: R16.2 IC3.1
N$24
  Top 0.61: R18.2 8.89,73.66 IC3.2
N$25
  Top 0.61: IC3.14 R15.2
N$26
  Top 0.406: IC4.2 8.89,50.8 R19.2
N$27
  Top 0.406: R20.2 19.05,50.8 IC4.13
N$28
  Top 0.406: IC4.1 R21.2
N$29
  Top 0.406: IC4.14 R22.2
N$30
  Top 0.305: R20.1 20.32,53.34 7.62,53.34 R19.1
  Top 0.406: R32.1 13.97,78.74 | 13.97,78.74 7.62,78.74 R16.1 | 13.97,78.74 15.49,77.22 20.74,77.22 21.76,76.2 R15.1
  Bottom 0.305: R17.1 R22.1
  Bottom 0.61: R16.1 R18.1 R21.1 R19.1 | R15.1 R17.1 | R22.1 R20.1
N$31  (via drill 0.35)
  Top 0.61: IN13-4.MP 76.05,11.58 76.05,13.16 71.58,17.63 67.03,17.63 64.03,20.62 62.23,20.62 59.36,23.49 v38.1,23.49
  Bottom 0.61: T2.2 34.72,27.51 34.92,27.51 38.1,24.33 v38.1,23.49
N$32
  Top 0.61: C5.2 IC2.6 | R31.2 5.08,87.32 3.96,88.44 3.96,89.36 4.62,90.02 4.93,90.02 6.35,91.44 6.35,93.49 7.45,94.59 8.23,94.59 IC2.2
  Bottom 0.305: IC2.6 13.97,92.71 11.43,95.25 IC2.2
N$33
  Top 0.305: IC3.7 12.09,62.89 15.79,62.89 16.4,63.5 IC3.9
  Top 0.406: D1.C IC4.11 12.7,46.99 IC4.5 | R23.2 7.62,39.37 IC4.7
  Top 0.61: IC3.5 15.24,66.04 IC3.11
  Bottom 0.305: 19.41,65.13 19.41,66.95 IC3.11 | IC3.9 19.41,65.13 | 19.41,65.13 19.41,60.05 15.24,55.88 15.24,49.53 IC4.11 17.78,46.48 19.41,44.85 19.41,44.05 17.78,42.43 IC4.9 | IC4.5 10.16,43.93 11.79,42.31 11.79,41.51 10.16,39.88 IC4.7
  Bottom 0.61: C2.+ 4.83,37.08 R23.2
N$34
  Top 0.305: R30.2 IC2.5
  Bottom 0.305: R29.2 IC2.5
N$35
  Top 0.61: C1.+ 6.35,97.79 IC2.1
  Bottom 0.305: R31.1 2.54,86.26 1.57,87.23 1.57,93.01 C1.+ | R30.1 20.02,91.75 19.92,91.75 17.38,94.28 15.45,94.28 11.95,97.79 IC2.1
N$36
  Top 0.305: C6.1 38.1,81.28 R32.2
  Bottom 0.305: R32.2 R33.1
  Bottom 0.61: IC1.3 14.12,31.9 20.15,31.9 25.4,37.15 25.4,76.2 R33.1
N$37
  Top 0.61: T2.3 38.48,30.86 IC7.1
N$38  (via drill 0.35)
  Top 0.508: v30.48,104.14 31.75,102.87 v31.75,99.06
  Top 0.61: C4.1 13.97,86.36 10.67,89.66 10.67,90.63 8.89,92.41 IC2.3
  Bottom 0.305: IC2.3 7.62,93.98 3.52,93.98 2.54,93 R28.1
  Bottom 0.508: R27.1 30.53,109.27 29.91,109.27 29.2,108.56 29.2,107.56 30.48,106.29 v30.48,104.14 | v31.75,99.06 C4.1
N$39
  Top 0.61: R68.E R69.2
N$40
  Top 0.61: IC34.3 194.46,90.32 192.58,90.32 191.46,91.44 R155.1 187.96,91.44 C39.1
  Bottom 0.508: R84.1 185.48,96.46 185.48,94.75 186.69,93.54 C39.1
N$41
  Top 0.508: IC10.3 49.53,91.44 R56.1 C9.1
  Bottom 0.508: IC10.3 53.34,92.71 56.69,96.06 56.69,98.23 57.32,98.86 59.49,98.86 R80.1
N$42  (via drill 0.35)
  Top 0.508: J1.3 35.45,108.06 39.37,104.14 58.42,104.14 v67.31,113.03
  Bottom 0.508: v67.31,113.03 68.58,114.3 189.68,114.3 J2.3
N$43
  Top 1.016: D4.C R104.2 57.75,19.69 C17.1 62.64,14.79 R86.2
N$44
  Top 0.508: R104.1 R105.E
N$45  (via drill 0.35)
  Top 0.508: IC15.5 v36.2,4.45
  Bottom 0.508: v36.2,4.45 38.1,6.35 45.72,6.35 | R142.1 44.63,5.26 45.72,6.35 | Q3.3 47.62,6.35 45.72,6.35
N$46
  Top 0.61: IC8.1 R45.2
N$47
  Top 0.406: IC9.2 40.64,50.8 R48.2
N$48
  Top 0.305: R44.1 53.34,77.47 R60.1 52.07,80.01 40.64,80.01 R45.1 | R49.1 52.07,53.34 39.37,53.34 R48.1
  Bottom 0.61: R48.1 R50.1 R47.1 R45.1 | R49.1 R51.1 | R46.1 R44.1
N$49  (via drill 0.35)
  Top 0.61: 53.34,46.99 IC9.11 48.37,46.99 47.61,46.23 43.69,46.23 IC9.5 | 53.34,46.99 D2.C | IC9.7 40.49,37.95 38.91,37.95 37.79,36.83 R52.2 | v46.99,45.29 48.12,45.29 48.41,45.57 51.92,45.57 53.34,46.99 | IC8.5 43.07,66.04 43.84,65.28 44.45,65.28 | v46.99,64.77 46.48,65.28 44.45,65.28 | 44.45,65.28 43.94,64.77 v39.37,64.77
  Bottom 0.61: R52.2 C8.+ | IC9.5 41.91,44.15 43.69,42.37 43.69,41.45 41.91,39.67 IC9.7 | v46.99,45.29 47.75,44.52 47.75,43.99 49.53,42.21 IC9.9 | IC9.11 49.53,47.29 47.75,49.07 47.75,61.42 49.53,63.2 IC8.9 49.17,63.5 47.75,64.92 | 47.75,64.92 47.75,66.5 49.53,68.28 IC8.11 | v46.99,64.77 47.14,64.92 47.75,64.92 | v39.37,64.77 40.13,64.01 40.13,63.04 41.91,61.26 IC8.7
N$50
  Top 0.508: R123.2 48.37,13.22 50.37,11.23 50.37,9.08 50.99,8.46 54.65,8.46 55.68,7.43 55.68,5.92 R105.A
N$51
  Top 0.61: IC10.7 C10.1
  Bottom 0.61: R56.2 45.41,91.44 46.53,92.56 47.45,92.56 48.42,91.59 54.76,91.59 IC10.7
N$52
  Top 0.305: IC10.2 53.75,95.25 55.78,93.22 57.91,93.22 IC10.6
  Top 0.61: R59.2 48.26,95.25 IC10.2 | IC10.6 C10.2
N$53
  Top 0.61: R58.2 IC10.5
  Bottom 0.61: R58.2 63.5,87.63 R57.2
N$54
  Top 0.61: C7.+ 45.72,97.79 IC10.1 52.07,97.79 56.03,93.83 62.69,93.83 63.5,93.02 R58.1
  Bottom 0.61: C7.+ R59.1
N$55  (via drill 0.35)
  Top 0.61: D2.A 54.61,37.46 R53.2 | v45.72,87.63 45.72,96.01 43.19,98.54 43.19,99.58 43.93,100.32 44.97,100.32 46.23,99.06 C7.-
  Bottom 0.61: D2.A 51.31,42.67 51.31,44.91 50.65,45.57 48.71,45.57 45.72,48.56 v45.72,87.63
N$56  (via drill 0.35)
  Top 0.305: C11.1 50.8,82.55 62.23,82.55 R60.2
  Top 0.61: v63.5,35.56 61.6,33.66 44.45,33.66 42.55,31.75 v42.55,31.12
  Bottom 0.305: R60.2 R61.1
  Bottom 0.61: R61.1 v63.5,35.56 | v42.55,31.12 42.55,29.84 IC7.3
N$57
  Top 0.61: IC14.3 74.93,92.71 R62.1 72.39,90.17 C14.1
  Bottom 0.508: R85.1 71.12,93.98 R62.1
N$58
  Bottom 0.61: R35.2 IN-13-2.MP
N$59  (via drill 0.35)
  Top 0.508: v79.38,16.51 78.37,16.51 77.3,17.58 73.23,17.58 70.28,20.52 67.48,20.52 67.05,20.95 v66.04,20.95
  Top 0.61: v79.38,16.51 80.97,16.51 82.09,15.39 84.94,15.39 IN13-6.MP
  Bottom 0.508: v66.04,20.95 66.06,20.98 66.06,22.33 64.26,24.13 T3.2
N$60
  Top 0.61: IC8.13 50.8,73.66 R46.2
N$61
  Top 0.61: IC8.2 40.64,72.39 R47.2
N$62
  Top 0.61: IC8.14 R44.2
N$63
  Top 0.406: IC9.13 50.8,52.07 R49.2
N$64
  Top 0.406: R50.2 IC9.1
N$65
  Top 0.406: IC9.14 R51.2
N$66
  Top 0.61: T3.3 64.77,26.42 67.06,24.13 IC11.1
N$67
  Top 0.61: R37.2 IC12.1
N$68
  Top 0.61: IC13.2 69.85,50.8 R40.2
N$69
  Top 0.305: R41.1 81.28,53.34 68.58,53.34 R40.1
  Top 0.61: R66.1 71.12,81.28 R37.1 | R40.1 R42.1
  Bottom 0.61: R39.1 R37.1 | R66.1 82.55,77.47 R36.1 R38.1 R43.1 R41.1
N$70
  Top 0.61: D3.C IC13.11 73.66,46.99 IC13.5 | IC12.5 73.66,68.58 IC12.11 | IC13.7 69.7,37.95 68.12,37.95 67,36.83 R54.2
  Bottom 0.61: C13.+ 66.04,34.67 R54.2 | IC12.11 80.01,68.58 81.28,67.31 81.28,64.77 80.01,63.5 IC12.9 | IC13.11 80.01,46.99 81.28,45.72 81.28,43.18 80.01,41.91 IC13.9 | IC12.5 69.85,66.04 68.58,64.77 68.58,62.23 69.85,60.96 IC12.7 71.12,56.85 72.9,55.07 72.9,46.53 71.12,44.75 IC13.5 69.85,44.45 68.58,43.18 68.58,40.64 69.85,39.37 IC13.7
N$71
  Bottom 0.305: C15.1 76.2,87.63 R62.2 79.05,94.28 81.07,94.28 82.03,95.25 IC14.7
N$72
  Top 0.61: R65.2 IC14.2 85.09,95.25 IC14.6
  Bottom 0.61: C15.2 76.2,86.77 75.08,87.88 75.08,91.9 76.2,93.02 R65.2
N$73
  Top 0.61: IC14.5 R64.2
  Bottom 0.305: R63.2 IC14.5
N$74
  Top 0.61: C12.+ 68.07,95.25 69.33,96.51 70.37,96.51 71.63,95.25 R65.1 74.62,95.25 75.74,96.37 78.59,96.37 IC14.1 85.09,97.79 86.51,96.37 88.75,96.37 89.41,95.71 89.41,93.47 R64.1
N$75
  Top 0.61: D3.A 83.82,34.29 R55.2
  Bottom 0.61: C12.- 69.85,91.75 70.97,90.63 70.97,78.89 74.93,74.93 74.93,43.48 77.92,40.49 79.86,40.49 80.98,39.37 D3.A
N$76  (via drill 0.35)
  Top 0.305: R67.1 88.18,77.47 87.22,76.5 85.96,76.5 82.45,80.01 v77.47,80.01
  Top 0.61: R67.1 R66.2
  Bottom 0.305: C16.1 v77.47,80.01
  Bottom 0.61: IC11.3 80.16,30.63 80.16,32.21 85.09,37.14 85.09,73.66 R67.1
N$77
  Top 0.61: IC12.13 80.01,73.66 R38.2
N$78
  Top 0.61: R39.2 69.85,73.66 IC12.2
N$79
  Top 0.61: R36.2 IC12.14
N$80
  Top 0.61: IC13.13 80.01,52.07 R41.2
N$81
  Top 0.61: IC13.1 R42.2
N$82
  Top 0.61: IC13.14 R43.2
N$83
  Top 0.61: T6.1 155.19,18.03 IC23.2 164.13,21.59 165.25,20.47 168.76,20.47 R68.S
N$84  (via drill 0.35)
  Top 0.508: Q1.D 20.95,10.16 R124.2
  Top 0.61: v31.11,15.88 31.11,19.62 31.18,19.69
  Top 1.016: 31.18,19.69 L1.1
  Bottom 0.61: R124.2 26.67,10.16 29.36,12.85 29.36,13.8 31.11,15.55 v31.11,15.88
  pour Top (no thermals): 29.21,20.32 36.2,20.32 36.83,20.95 40.01,20.95 40.64,20.32 40.64,19.05 39.37,17.78 29.21,17.78
N$85
  Top 1.016: F1.1 9.84,105.66 9.84,105.83 8.87,106.8 7.43,106.8 4.77,104.14 J3.3
N$86
  Top 0.61: IC20.2 99.06,72.39 R91.2
N$87
  Top 0.61: IC20.1 R89.2
N$88
  Top 0.61: IC20.14 R88.2
N$89
  Top 0.61: R90.2 109.22,72.39 IC20.13
N$90
  Top 0.61: R92.2 99.06,52.07 IC21.2
N$91
  Top 0.61: R94.2 IC21.1
N$92
  Top 0.61: IC21.14 R95.2
N$93
  Top 0.61: IC21.13 109.22,52.07 R93.2
N$94
  Top 0.61: IC28.2 128.27,72.39 R129.2
N$95
  Top 0.61: IC28.1 R127.2
N$96
  Top 0.61: IC28.14 R126.2
N$97
  Top 0.61: R128.2 138.43,72.39 IC28.13
N$98
  Top 0.61: IC29.2 128.27,50.8 R130.2
N$99
  Top 0.61: R132.2 IC29.1
N$100
  Top 0.61: IC29.14 R133.2
N$101
  Top 0.61: IC29.13 138.43,52.07 R131.2
N$102
  Top 0.61: IC24.2 157.48,72.39 R110.2
N$103
  Top 0.61: IC24.1 R108.2
N$104
  Top 0.61: IC24.14 R107.2
N$105
  Top 0.61: IC24.13 167.64,73.66 R109.2
N$106
  Top 0.61: R111.2 157.48,52.07 IC25.2
N$107
  Top 0.61: R113.2 IC25.1
N$108
  Top 0.61: IC25.14 R114.2
N$109
  Top 0.61: R112.2 167.64,50.8 IC25.13
N$110
  Top 0.61: IC32.2 186.69,72.39 R148.2
N$111
  Top 0.61: IC32.1 R146.2
N$112
  Top 0.61: IC32.14 R145.2
N$113
  Top 0.61: IC32.13 196.85,73.66 R147.2
N$114
  Top 0.61: IC33.2 186.69,50.8 R149.2
N$115
  Top 0.61: R151.2 IC33.1
N$116
  Top 0.61: IC33.14 R152.2
N$117
  Top 0.508: R124.1 C18.1
N$118
  Top 0.508: R161.2 43.82,13.11 R143.1 43.41,6.58 IC15.7
N$119
  Top 0.508: IC15.6 38.54,4.25 IC15.2 33.66,14.85 R161.1 32.13,14.35 31.5,14.35 C19.1
N$120
  Top 0.508: Q1.G 21.39,5.71 D9.C 26.87,4.45 Q2.3
N$121
  Top 0.508: R162.2 24.56,12.7 D9.A 24.77,8.89 Q2.2 28.78,6.55 28.78,7.43 30.22,8.87 33.91,8.87 35.01,9.97 IC15.3
N$122
  Top 0.508: Q3.2 53.98,6.98 R105.S
N$123
  Top 1.016: F1.2 13.13,107.59 S2.1
N$126
  Bottom 0.61: R87.2 IN-13-5.MP
N$127
  Top 0.61: T5.2 91.64,19.25 91.44,19.25 90.73,18.54 90.73,17.53 94.44,13.82 100.79,13.82 101.45,13.16 101.45,11.58 IN13-10.MP
N$128
  Top 0.61: T5.3 97.54,22.61 IC19.1
N$131
  Top 0.305: R93.1 110.49,53.34 97.79,53.34 R92.1
  Top 0.61: R102.1 110.49,80.01 | 110.49,80.01 97.79,80.01 95.25,77.47 R89.1 | R88.1 110.49,78.74 110.49,80.01
  Bottom 0.61: R89.1 R91.1 R94.1 R92.1 | R95.1 R93.1 | R90.1 R88.1
N$132  (via drill 0.35)
  Top 0.61: D5.C IC21.11 102.87,46.99 IC21.5 99.06,44.45 98.3,45.21 94.49,45.21 v93.98,45.72 | IC21.7 98.91,37.95 97.33,37.95 96.21,36.83 R96.2 | v93.98,60.96 IC20.7 105.41,60.96 IC20.9 | IC20.5 102.11,67.82 106.02,67.82 106.79,68.58 IC20.11
  Bottom 0.61: C23.+ 95.25,34.67 R96.2 | v93.98,60.96 v93.98,45.72 96.52,43.18 96.52,39.37 IC21.7 | IC20.7 100.33,61.26 98.55,63.04 98.55,63.96 100.33,65.74 IC20.5 | IC21.9 110.49,44.45 110.49,45.72 109.22,46.99 IC21.11
N$133  (via drill 0.35)
  Top 0.61: IC22.7 113.03,91.44 111.76,91.44 | 111.76,91.44 R98.2 | v111.76,90.17 111.76,91.44
  Bottom 0.61: C25.1 111.76,88.9 v111.76,90.17
N$134  (via drill 0.35)
  Top 0.305: v105.41,88.9 106.68,90.17 v107.06,90.17
  Top 0.61: R101.2 IC22.2 114.6,95.25 115.72,96.37 117.96,96.37 118.62,95.71 118.62,94.79 116.84,93.01 IC22.6
  Bottom 0.305: C25.2 v105.41,88.9 | v107.06,90.17 107.06,93.09 IC22.2
N$135
  Top 0.61: IC22.5 R100.2
  Bottom 0.61: R100.2 121.92,87.63 R99.2
N$136  (via drill 0.35)
  Top 0.61: C22.+ 97.28,95.25 98.54,96.51 99.58,96.51 100.84,95.25 R101.1 104.14,96.52 107.95,96.52 IC22.1 114.6,97.79 115.72,98.91 120.5,98.91 v121.92,97.49
  Bottom 0.61: v121.92,97.49 R100.1
N$137  (via drill 0.35)
  Top 0.61: D5.A 113.03,34.29 R97.2 | v91.59,82.39 v95.1,85.9
  Bottom 0.61: D5.A 110.19,39.37 109.07,38.25 96.67,38.25 96.52,38.1 91.59,43.03 v91.59,82.39 | C22.- 95.1,91.29 v95.1,85.9
N$138
  Top 0.305: C26.1 104.05,85.09 105.01,86.06 105.81,86.06 106.98,84.88 106.98,84.69 108.01,83.67 119.53,83.67 R102.2
  Top 0.61: R102.2 R103.1
  Bottom 0.61: IC19.3 110.64,30.63 110.95,30.63 121.92,41.6 R103.1
N$145
  Top 0.61: R70.E R71.2
N$146
  Top 0.61: T7.1 124.71,18.03 IC27.2 133.65,21.59 134.77,20.47 138.28,20.47 R70.S
N$147
  Top 0.61: T8.1 185.67,16.76 IC31.2 194.61,20.32 195.73,19.2 199.24,19.2 R2.S
N$157
  Bottom 0.61: R106.2 IN-13-6.MP
N$158
  Top 0.61: IN13-12.MP 138.43,7.62 142.24,7.62 149.86,15.24 149.86,19.05 151.13,20.32 T6.2
N$159
  Top 0.61: T6.3 153.92,24.13 IC23.1
N$162
  Top 0.305: R111.1 156.21,53.34 168.91,53.34 R112.1
  Top 0.61: R121.1 166.22,77.32 | R108.1 154.63,76.2 155.75,75.08 159.87,75.08 162.11,77.32 166.22,77.32 | R107.1 170.33,77.32 166.22,77.32
  Bottom 0.61: R111.1 R113.1 R110.1 R108.1 | R109.1 R107.1 | R114.1 R112.1
N$163  (via drill 0.35)
  Top 0.61: D6.C IC25.11 161.29,46.99 IC25.5 157.59,44.45 156.83,45.21 155.45,45.21 v154.94,45.72 | IC25.7 157.33,37.95 155.75,37.95 154.63,36.83 R115.2 | IC24.7 160.53,62.74 164.45,62.74 165.21,63.5 IC24.9 | IC24.5 160.53,67.82 163.07,67.82 163.83,68.58 IC24.11
  Bottom 0.61: C28.+ 153.67,34.67 R115.2 | IC24.5 158.75,65.74 156.97,63.96 156.97,63.04 158.75,61.26 IC24.7 154.94,57.15 v154.94,45.72 | IC25.11 166.37,46.69 168.15,44.91 168.15,43.99 166.37,42.21 IC25.9 | IC25.5 156.21,44.45 154.94,43.18 154.94,40.64 156.21,39.37 IC25.7
N$164
  Top 0.61: IC26.7 171.45,91.44 R117.2
  Bottom 0.61: C30.1 164.59,86.87 164.59,90.18 163.83,90.94 R117.2
N$165
  Top 0.61: R120.2 IC26.2 173.02,95.25 174.14,96.37 176.38,96.37 177.04,95.71 177.04,94.79 175.26,93.01 IC26.6
  Bottom 0.61: C30.2 163.83,89.86 162.71,90.98 162.71,91.9 163.83,93.02 R120.2
N$166
  Top 0.61: IC26.5 R119.2
  Bottom 0.61: R118.2 177.8,87.63 R119.2
N$167  (via drill 0.35)
  Top 0.61: C27.+ 155.7,95.25 156.96,96.51 158,96.51 159.26,95.25 R120.1 163.83,97.79 IC26.1 170.18,100.33 176.23,100.33 177.8,98.76 v179.07,98.76 | v177.8,92.71 R119.1
  Bottom 0.61: v177.8,92.71 179.07,93.98 v179.07,98.76
N$168
  Top 0.61: D6.A 171.45,33.02 R116.2
  Bottom 0.61: D6.A 171.45,44.75 172.57,45.87 172.57,48.11 181.46,57 181.46,77.93 180.8,78.59 179.88,78.59 179.22,77.93 179.22,77.31 178.26,76.35 172.88,76.35 165.26,83.97 163.37,83.97 162.71,84.63 162.71,84.94 158.6,89.05 158.6,90.63 157.48,91.75 C27.-
N$169
  Top 0.61: C31.1 161.29,83.82 177.8,83.82 R121.2 R122.1
  Bottom 0.61: IC23.3 163.83,24.13 163.83,54.91 180.34,71.42 R122.1
N$176
  Top 0.61: R72.E R73.2
N$177
  Top 0.61: T5.1 95.5,18.03 IC19.2 104.44,21.59 105.56,20.47 109.07,20.47 R72.S
N$178
  Top 0.61: R74.E R75.2
N$188
  Bottom 0.61: R125.2 IN-13-7.MP
N$189
  Top 0.61: T7.2 122.12,19.25 121.92,19.25 121.21,18.54 121.21,17.53 121.92,16.82 IN13-14.MP
N$190
  Top 0.61: T7.3 124.71,24.13 IC27.1
N$193  (via drill 0.35)
  Top 0.305: R130.1 127,53.34 139.7,53.34 R131.1
  Top 0.61: R127.1 v127,78.74 | R140.1 v129.54,81.28
  Bottom 0.61: v127,78.74 v129.54,81.28 | R140.1 142.24,80.01 R126.1 R128.1 | R127.1 R129.1 R132.1 R130.1 | R131.1 R133.1
N$194
  Top 0.61: D7.C IC29.11 132.08,46.99 IC29.5 | IC29.7 128.12,37.95 126.54,37.95 125.42,36.83 R134.2 | IC28.7 131.32,62.74 135.24,62.74 136,63.5 IC28.9 | IC28.11 134.62,66.04 IC28.5
  Bottom 0.61: C33.+ 124.46,34.67 R134.2 | IC28.7 135.38,55.12 135.38,49.07 137.16,47.29 IC29.11 137.16,46.69 135.38,44.91 135.38,43.99 137.16,42.21 IC29.9 | IC28.9 138.43,63.5 139.7,64.77 139.7,67.31 138.43,68.58 IC28.11 | IC29.7 128.27,39.37 127,40.64 127,43.18 128.27,44.45 IC29.5
N$195
  Top 0.61: IC30.7 146.05,94.95 147.83,93.17 147.83,92.25 147.17,91.59 144.93,91.59 142.69,93.83 137.01,93.83 R136.2
  Bottom 0.61: C35.1 135.38,86.87 135.38,90.18 134.62,90.94 R136.2
N$196
  Top 0.61: R139.2 IC30.2 143.51,95.25 IC30.6
  Bottom 0.61: C35.2 134.62,89.86 133.5,90.98 133.5,91.9 134.62,93.02 R139.2
N$197
  Top 0.61: R138.2 IC30.5
  Bottom 0.61: R137.2 148.59,87.63 R138.2
N$198  (via drill 0.35)
  Top 0.61: C32.+ 126.49,95.25 127.75,96.51 128.79,96.51 130.05,95.25 R139.1 133.35,96.52 137.16,96.52 IC30.1 142.24,97.79 143.51,99.06 149.86,99.06 v151.13,97.79
  Bottom 0.61: v151.13,97.79 R138.1
N$199  (via drill 0.35)
  Top 0.61: R135.2 142.24,33.02 D7.A 140.97,38.1 v132.08,38.1
  Bottom 0.61: C32.- 128.27,91.75 129.39,90.63 129.39,82.61 131.32,80.68 131.32,70.66 130.66,70 128.72,70 127.76,69.04 127.76,60.5 128.27,59.99 128.27,57.15 129.69,55.73 130.66,55.73 131.32,55.07 131.32,38.86 v132.08,38.1
N$200
  Top 0.61: C36.1 133.04,85.09 134.16,86.21 146.2,86.21 R140.2
  Bottom 0.61: IC27.3 139.85,30.63 139.85,32.21 140.97,33.33 140.97,67.31 R141.1 R140.2
N$207
  Top 0.61: T3.1 68.33,21.84 IC11.2 73.96,21.59 75.08,20.47 78.59,20.47 R74.S
N$208
  Top 0.61: R77.2 R76.E
N$209
  Top 0.61: T2.1 36.45,26.29 IC7.2 45.38,29.84 46.5,28.73 50.01,28.73 R76.S
N$218
  Top 0.61: IC26.3 162.56,92.71 R117.1 158.75,91.44 C29.1
  Bottom 0.508: R83.1 158.75,93.98 R117.1
N$219
  Bottom 0.61: R144.2 IN-13-8.MP
N$220
  Top 0.61: T8.2 181.81,17.98 181.61,17.98 177.6,13.97 149.86,13.97 147.32,11.43 IN13-16.MP
N$221
  Top 0.61: T8.3 187.71,21.34 IC31.1
N$224
  Top 0.305: R149.1 185.42,53.34 198.12,53.34 R150.1
  Top 0.61: R145.1 200.66,80.01 R159.1 195.43,77.32 191.32,77.32 189.08,75.08 184.96,75.08 183.84,76.2 R146.1
  Bottom 0.61: R149.1 R151.1 R148.1 R146.1 | R147.1 R145.1 | R152.1 R150.1
N$225
  Top 0.305: R153.2 184.06,36.83 185.02,37.79 186.39,37.79 IC33.7 189.34,39.37 190.3,38.4 196.64,38.4 197.21,38.97 197.21,43.54 | IC33.9 197.21,43.54 | 198.12,46.99 198.12,44.45 197.21,43.54
  Top 0.61: IC32.5 190.5,66.04 193.04,68.58 IC32.11 195.58,68.28 197.36,66.5 197.36,65.58 195.58,63.8 IC32.9 190.5,63.5 IC32.7 | D8.C 198.12,46.99 IC33.11 190.5,46.99 IC33.5
  Bottom 0.61: C38.+ 182.88,34.67 R153.2 | IC32.7 193.8,55.12 193.8,49.07 195.58,47.29 IC33.11
N$226
  Top 0.61: IC34.7 200.47,95.25 199.35,96.37 192.58,96.37 191.92,95.71 191.92,94.79 193.04,93.67 R155.2
  Bottom 0.61: C40.1 193.04,87.63 R155.2
N$227
  Top 0.61: R158.2 IC34.2 199.39,95.25 201.93,92.71 IC34.6
  Bottom 0.61: C40.2 193.04,86.55 191.92,87.67 191.92,91.9 193.04,93.02 R158.2
N$228
  Top 0.61: IC34.5 R157.2 207.01,87.63 R156.2
N$229
  Top 0.61: C37.+ 184.91,95.25 186.17,96.51 187.21,96.51 188.47,95.25 R158.1 191.16,95.91 191.16,96.03 192.26,97.13 196.19,97.13 IC34.1 197.51,97.13 199.67,97.13 200.78,96.01 202.99,96.01 203.35,96.37 205.59,96.37 206.25,95.71 206.25,93.47 R157.1
N$230
  Top 0.61: D8.A 200.66,33.02 R154.2
  Bottom 0.61: D8.A 200.66,44.75 199.24,46.17 199.24,76.66 198.58,77.32 198.27,77.32 190.35,85.24 190.35,85.55 187.96,87.94 187.96,93.98 C37.-
N$231
  Top 0.61: R160.1 R159.2 207.52,83.31 191.01,83.31 C41.1
  Bottom 0.61: R160.1 209.55,38.1 IC31.3
N$238
  Top 0.61: R78.E R79.2
N$239
  Top 0.61: T1.1 3.61,27.99 3.81,27.99 6.3,30.48 IC1.2 13.97,30.48 15.39,29.06 18.9,29.06 20.02,27.94 R78.S
N$241
  Top 0.61: R150.2 196.85,52.07 IC33.13
VCC
  Top 0.508: L1.2 18.41,17.48 18.41,16.51 20.7,14.22 25.21,14.22 27.16,12.27 30.92,12.27 31.35,12.7 R143.2 33.25,10.18 IC15.4 | IC15.8 44.63,5.26 R142.2
  Top 1.016: 39.76,102.48 40.64,101.6 | 30.91,105.18 30.05,105.18 29.01,104.14 | C20.+ 6.98,22.19 6.98,22.23
  Bottom 0.508: IC15.4 34.44,9.97 35.54,11.07 43.86,11.07 R142.2
  pour Top: -3.81,126.36 -10.16,120.01 -10.16,24.13 -7.62,21.59 19.68,21.59 21.59,23.49 35.56,23.49 37.47,21.59 59.05,21.59 61.6,19.05 62.87,19.05 66.04,15.88 66.04,-2.54 71.75,-8.26 214.63,-8.26 222.89,0 222.89,109.22 205.74,126.36
  pour Top (no thermals): 8.89,20.32 21.59,20.32 21.59,17.78 8.89,17.78
VCC/2  (via drill 0.35)
  Top 0.305: v66.04,86.36 54.61,86.36 R57.1 C9.2 | C14.2 68.58,88.9 78.74,88.9 R63.1 86.66,89.21 93.11,89.21 94.08,90.17 C24.2 96.52,88.9 97.79,87.63 109.22,87.63 R99.1
  Top 0.406: IC5.1 IC5.2
  Top 0.61: R156.1 198.27,86.21 188.11,86.21 C39.2 180.19,86.21 179.88,86.21 178.76,85.09 R118.1 167.95,85.09 166.83,86.21 158.9,86.21 C29.2 152.71,90.17 151.59,89.05 142.39,89.05 v140.97,87.63 128.27,87.63 C34.2 123.19,87.63 114.3,87.63 R99.1 | v33.02,83.82 27.94,83.82 R29.1 | C4.2 44.14,86.36 46.53,83.97 47.45,83.97 48.57,85.09 C9.2
  Bottom 0.305: R29.1 26.67,88.15 25.04,89.77 25.04,93.11 26.67,94.73 IC5.2 | C14.2 67.31,87.63 v66.04,86.36
  Bottom 0.61: v140.97,87.63 R137.1 | C4.2 34.29,85.09 v33.02,83.82 | IC5.1 35.56,106.68 R5.1

## Text on the board
tNames: LINE OUT | RESISTOR LADDER | BANDPASS FILTER | LINE IN | LOG-LIN | 60Hz | 150Hz | 400Hz | 1kHz | 6kHz | 15kHz | 2.5kHz | IN-13 DRIVER | HIGH VOLTAGE | 125V SW